# Allegro board LinkingInterfaceV1.2.brd
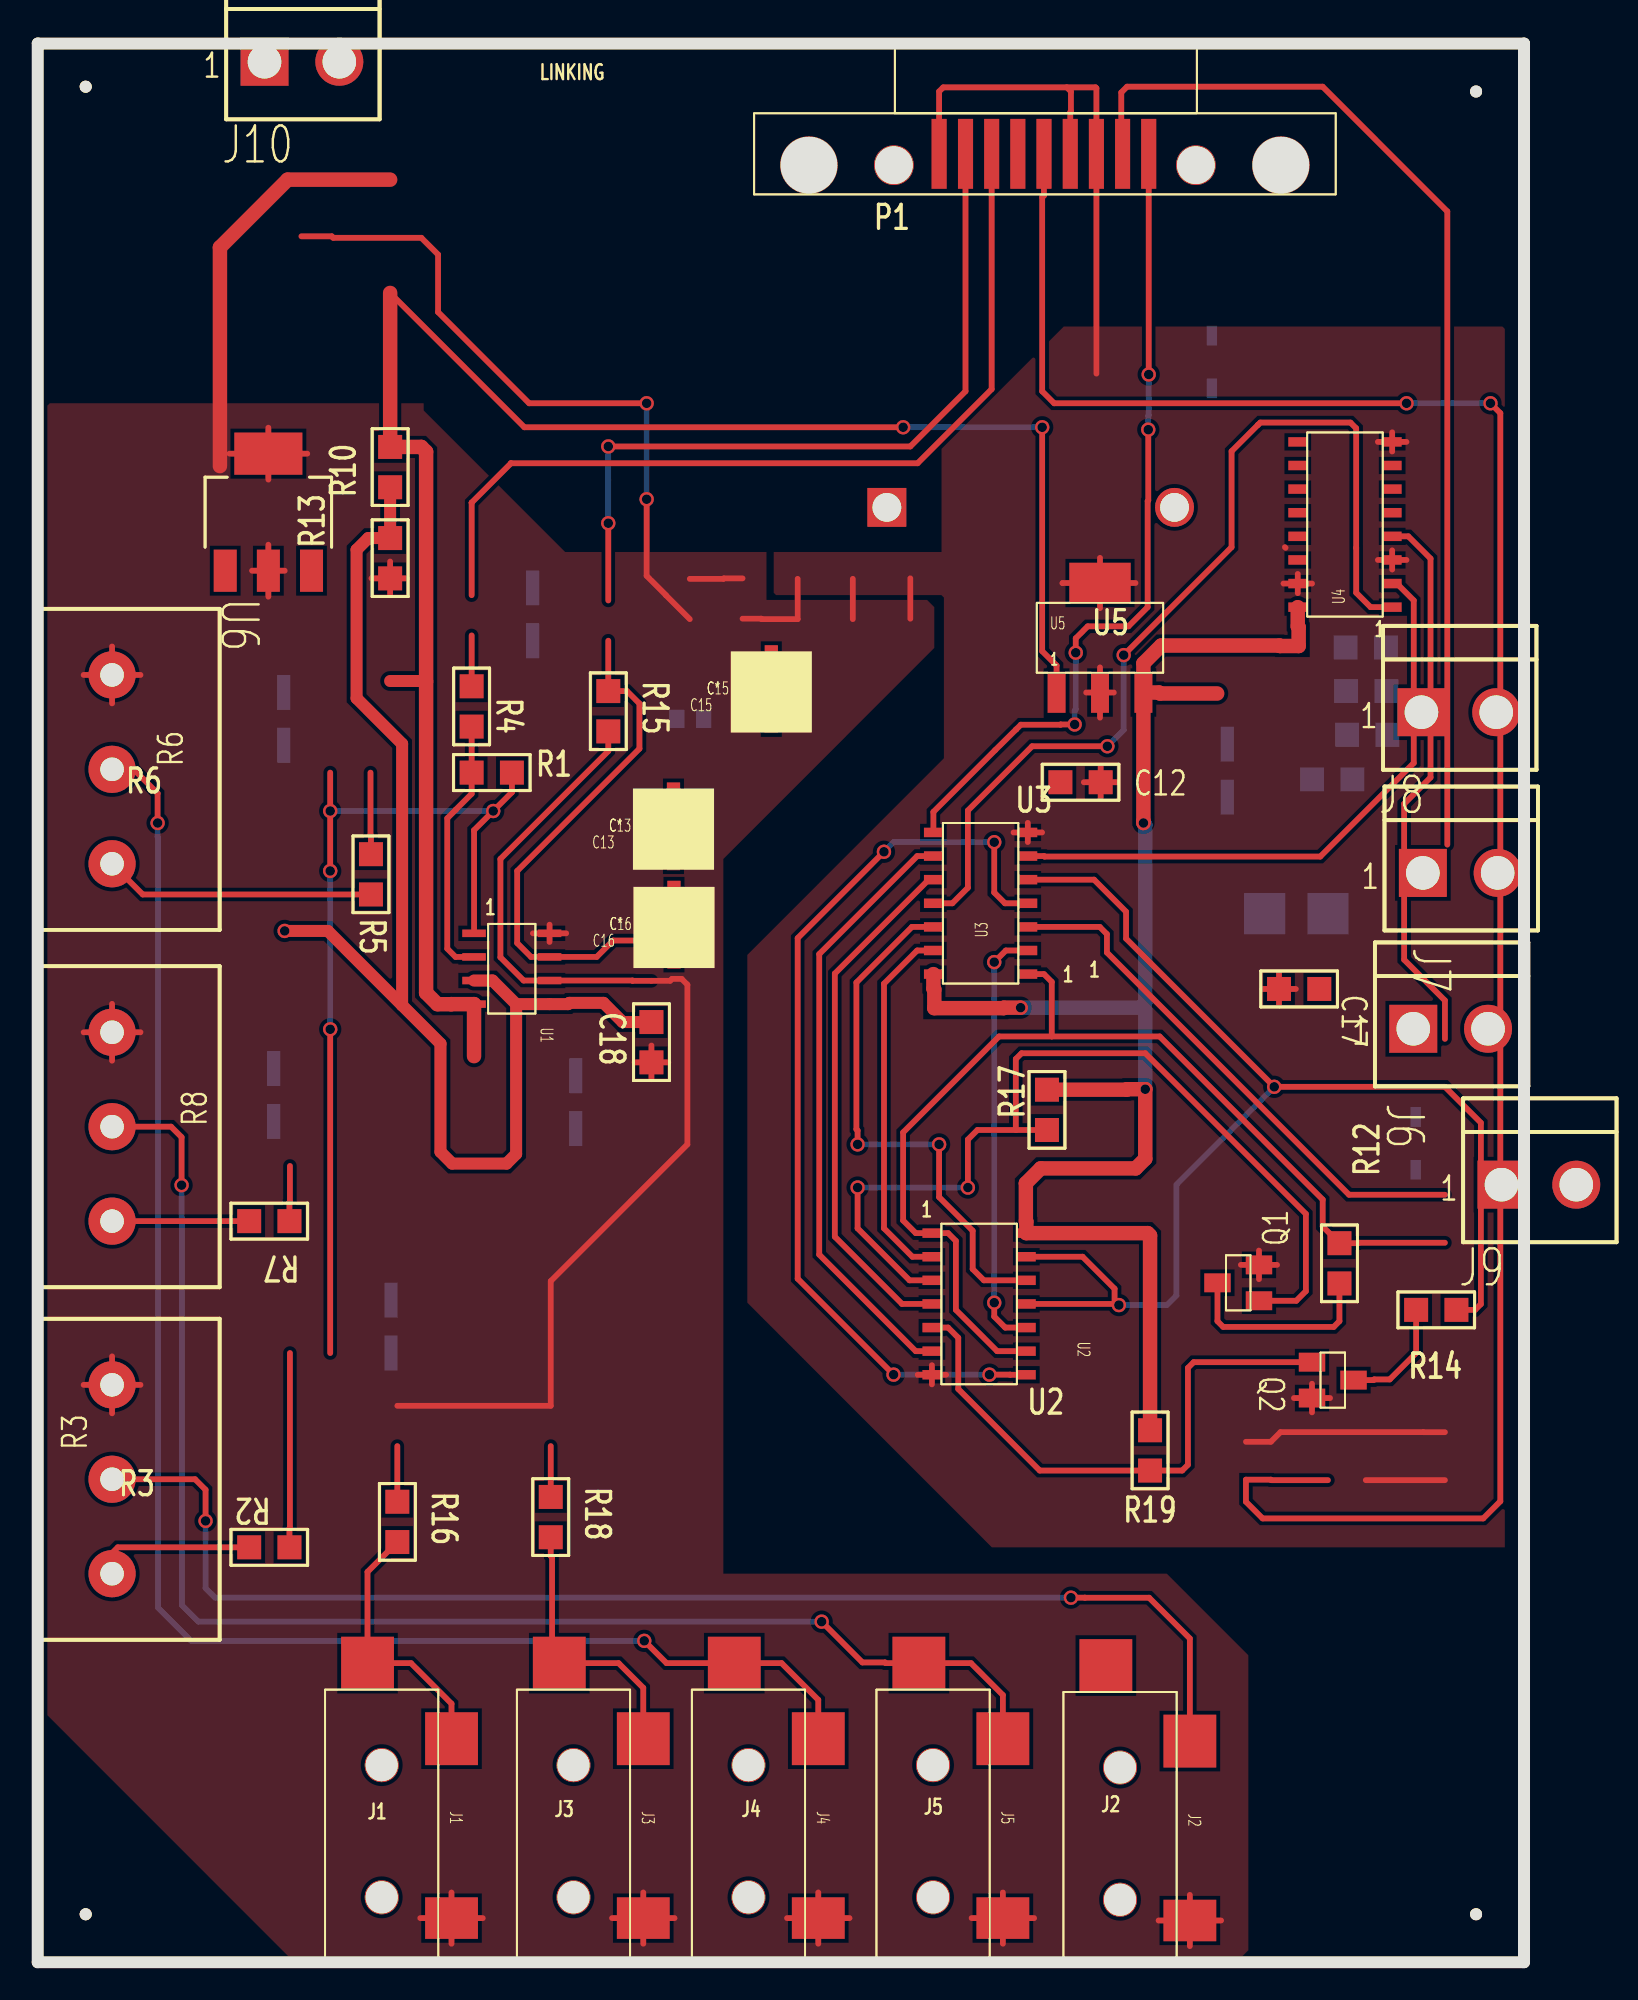
[diagram p0: board, top side]
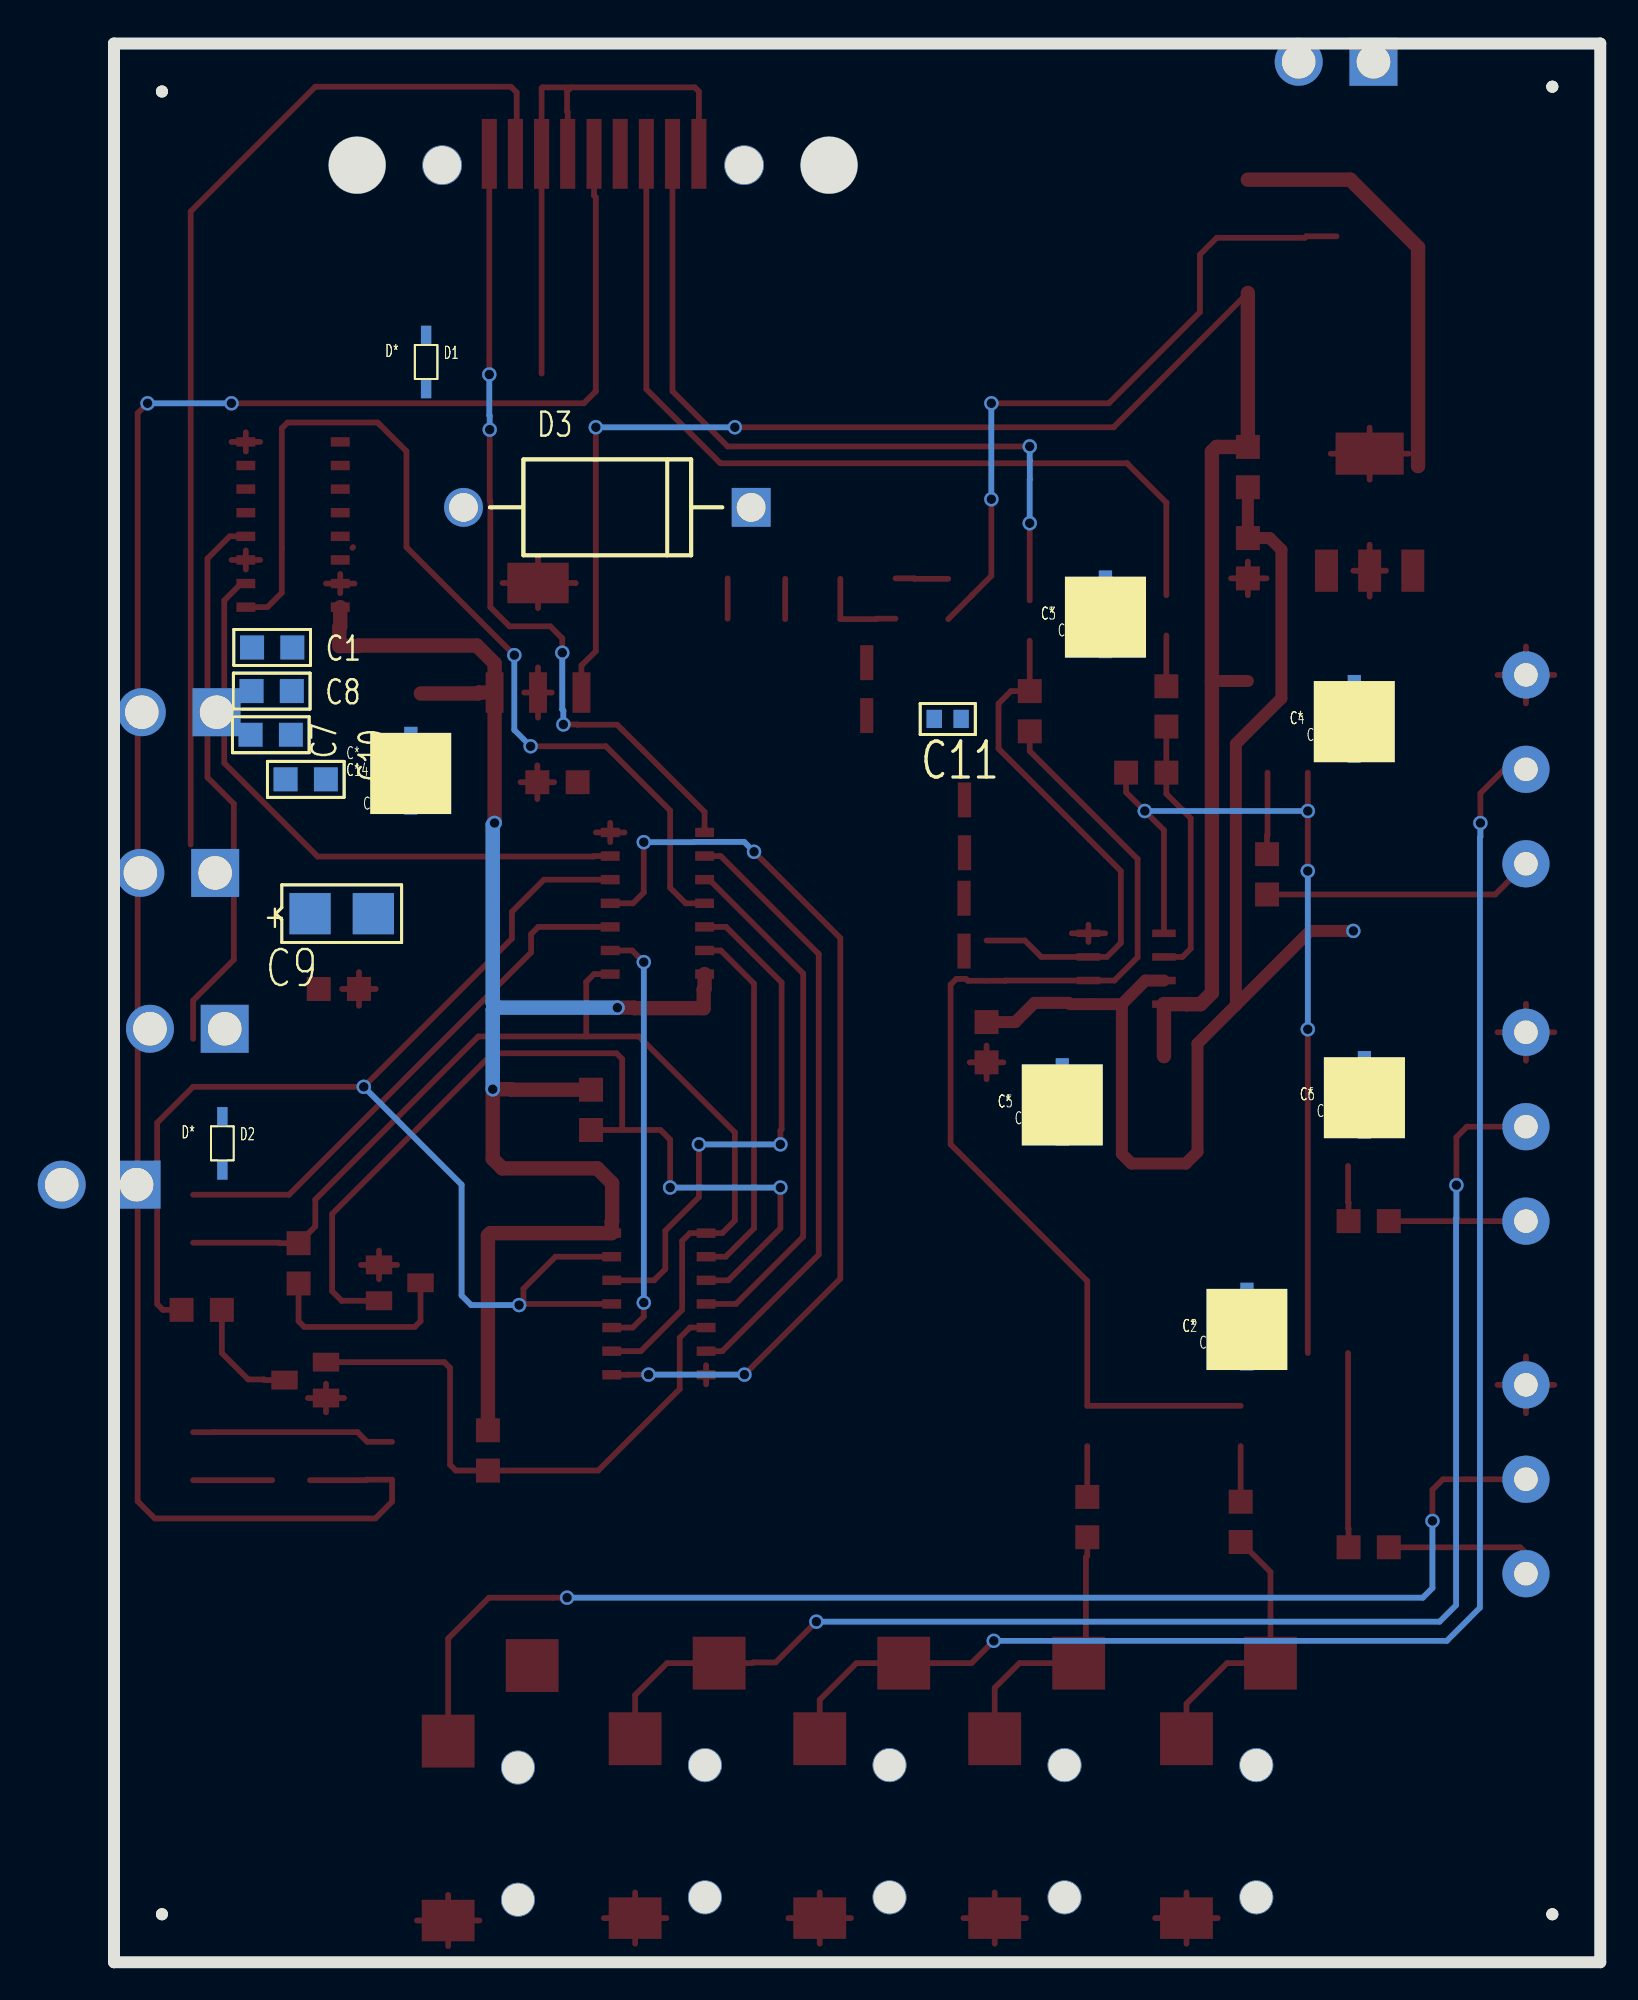
[diagram p1: board, bottom side, seen from below]

Outline 78.74 x 101.6 mm; copper layers: TOP, BOTTOM. Coordinates in mm from the lower left corner of the outline.
Outline path: 0,101.6 78.74,101.6 ; 0,101.6 78.74,101.6 ; 0,101.6 0,0 ; 0,101.6 0,0 ; 78.74,101.6 78.74,0 ; 78.74,101.6 78.74,0 ; 0,0 78.74,0 ; 0,0 78.74,0

## Placement (name value [footprint] x y rotation side)
C1  100nF  [SMC0805]  71.42 69.62 180 bottom
C2  10uF  [1_UF_CAP]  18.72 32.26 180 bottom
C3  1uF  [1_UF_CAP]  26.21 69.98 180 bottom
C4  10uF  [1_UF_CAP]  13.03 64.44 180 bottom
C5  4.7uF  [1_UF_CAP]  28.5 44.15 180 bottom
C6  10uF  [1_UF_CAP]  12.5 44.53 180 bottom
C7  100nF  [SMC0805]  71.5 65 180 bottom
C8  100nF  [SMC0805]  71.45 67.31 180 bottom
C9  22uF/Tant  [EIAB_SMCT3528_12]  68.35 55.52 180 bottom
C10  100nF  [SMC0805]  69.65 62.64 180 bottom
C11  100pF  [SMC0603]  35.28 65.84 180 bottom
C12  470nF  [SMC0805]  54.18 62.48 0 top
C13  10uF  [1_UF_CAP]  33.68 58.75 0 top
C14  10uF  [1_UF_CAP]  63.02 61.7 180 bottom
C15  10uF  [1_UF_CAP]  38.86 66.01 0 top
C16  10uF  [1_UF_CAP]  33.71 53.54 0 top
C17  100nF  [SMC0805]  65.76 51.54 0 top
C18  4.7uF  [SMR0805]  32.51 49.78 270 top
D1  1N4148  [1N4148_SOD523]  62.2 83.34 180 bottom
D2  1N4148  [1N4148_SOD523]  73 41.96 180 bottom
D3  SB1245  [DAX600_60D]  60.22 77.04 180 bottom
J1  TX_ECHOLINK  [35MMJACK]  21.97 2.29 270 top
J2  RX_ECHOLINK  [35MMJACK]  61.09 2.16 270 top
J3  TX_ALLSTAR  [35MMJACK]  32.13 2.29 270 top
J4  RX_ALLSTAR  [35MMJACK]  41.4 2.29 270 top
J5  RX_DTMF  [35MMJACK]  51.18 2.29 270 top
J6  2Pin Header  [BLKCON156_VHTM1SQ_SW156_2]  72.87 49.43 0 top
J7  2Pin Header  [BLKCON156_VHTM1SQ_SW156_2]  73.38 57.68 0 top
J8  2Pin Header  [BLKCON156_VHTM1SQ_SW156_2]  73.3 66.19 0 top
J9  2Pin Header  [BLKCON156_VHTM1SQ_SW156_2]  77.55 41.17 0 top
J10  0.156 VH  [BLKCON156_VHTM1SQ_SW156_2]  12.01 100.63 0 top
NOREF  -  [unnamed]  76.2 99.06 180 bottom
NOREF#2  -  [unnamed]  2.54 2.54 180 bottom
NOREF#3  -  [unnamed]  2.54 99.31 180 bottom
NOREF#4  -  [unnamed]  76.2 2.54 180 bottom
P1  CONNECTOR DB9  [DB9_263_R001]  47.75 95.76 0 top
Q1  -  [2N4401]  64.77 36.96 90 top
Q2  -  [2N4401]  67.44 29.84 270 top
R1  51k  [SMR0805]  22.99 62.99 0 top
R2  22k  [SMR0805]  13.34 21.97 180 top
R3  10k  [P60-20748]  3.94 20.57 90 top
R4  51k  [SMR0805]  22.99 67.56 270 top
R5  22k  [SMR0805]  17.65 58.67 270 top
R6  10k  [P60-20748]  3.94 58.17 90 top
R7  7.5k  [SMR0805]  13.34 39.24 180 top
R8  10k  [P60-20748]  3.94 39.24 90 top
R10  51k  [SMR0805]  18.67 78.11 90 top
R12  10K  [SMR0805]  68.96 35.94 90 top
R13  51k  [SMR0805]  18.67 73.28 90 top
R14  10K  [SMR0805]  73.03 34.54 0 top
R15  51k  [SMR0805]  30.23 67.31 270 top
R16  51k  [SMR0805]  19.05 24.38 270 top
R17  10K  [SMR0805]  53.47 44.07 90 top
R18  51k  [SMR0805]  27.18 24.64 270 top
R19  10K  [SMR0805]  58.93 26.04 90 top
U1  TL072  [TL082]  23.11 54.48 270 top
U2  74HC04  [74HC0]  47.37 38.61 270 top
U3  74HC08  [74HC0]  52.45 52.32 90 top
U4  -  [74HC157]  71.75 71.76 90 top
U5  LM2936/SOT  [LM2936_SOT]  53.98 67.18 0 top
U6  LM2940 / SOT223  LDO  [SOT223_1234]  9.93 73.69 0 top

## Library data of the parts
C1 C7 C8 C10-C12 C17 = C NP
C2 C4-C6 C14 C15 C18 = CAP POL
C3 C13 C16 = CAPACITOR POL
C9 = C POL
D1 D2 = 1N4148
D3 = DIODE SCHOTTKY_0
J1-J5 = PHONE JACK-3_2
J6-J9 = 2Pin Header
J10 = HEADER 2_4
P1 = CONNECTOR DB9
Q1 Q2 = 2N4401
R1 R2 R4 R5 R7 R10 R12-R19 = RESISTOR
R3 R6 R8 = POT
U1 = TL062_2
U2 = 74HC04_4
U3 = 74HC08_3
U4 = 74HC157_4
U5 = LM2936/SO_3
U6 = 78L05/TO92_4

## Footprints (pads in the part's own frame, mm; a bottom-side part is the same pattern mirrored in y, then rotated)
1_UF_CAP
  rect 0.701x1.849 smd: 1(0,0) 2(0,2.799)
1N4148_SOD523
  rect 0.551x1.049 smd: 1(0,0) 2(0,2.799)
2N4401
  rect 1.001x1.4 smd: 1(-0.03,0.071) 2(-0.98,2.271) 3(-1.93,0.071)
35MMJACK
  round 1.801 hole 1.699: (-8.151,-3.749) (-1.151,-3.749)
  rect 2.2x2.799 smd: 1(-0.051,-0.051)
  rect 2.799x2.799 smd: 2(-9.55,-0.051) 3(-13.551,-4.501)
74HC0
  rect 0.5x1.001 smd: 1(0,0) 2(1.25,0) 3(2.499,0) 4(3.749,0) 5(5.001,0) 6(6.251,0) 7(7.501,0) 8(7.501,5.001) 9(6.251,5.001) 10(5.001,5.001) 11(3.749,5.001) 12(2.499,5.001) 13(1.25,5.001) 14(0,5.001)
74HC157
  rect 0.5x1.001 smd: 1(0,0) 2(1.25,0) 3(2.499,0) 4(3.749,0) 5(5.001,0) 6(6.251,0) 7(7.501,0) 8(8.75,0) 9(8.75,5.001) 10(7.501,5.001) 11(6.251,5.001) 12(5.001,5.001) 13(3.749,5.001) 14(2.499,5.001) 15(1.25,5.001) 16(0,5.001)
BLKCON156_VHTM1SQ_SW156_2
  rect 2.54x2.54 hole 1.778: 1(0,0)
  round 2.54 hole 1.778: 2(3.962,0)
DAX600_60D
  round 2.057 hole 1.524: 1(0,0)
  rect 2.057x2.057 hole 1.524: 2(15.24,0)
DB9_263_R001
  round 3.048 hole 3: (-6.896,-0.599) (18.105,-0.599)
  round 2.101 hole 1.999: (-2.395,-0.599) (13.604,-0.599)
  rect 0.8x3.701 smd: 1(0,0) 2(1.4,0) 3(2.784,0) 4(4.171,0) 5(5.555,0) 6(6.949,0) 7(8.334,0) 8(9.721,0) 9(11.105,0)
EIAB_SMCT3528_12
  rect 2.184x2.184 smd: 1(0,0) 2(3.353,0)
LM2936_SOT
  rect 0.95x2.149 smd: 1(0,0.051) 2(2.301,0.051) 3(4.6,0.051)
  rect 3.251x2.149 smd: 4(2.301,5.85)
P60-20748
  round 2.499 hole 1.25: 1(0,0) 2(5.001,0) 3(10,0)
SMC0603
  rect 0.813x0.965 smd: 1(0,0) 2(1.422,0)
SMC0805
  rect 1.27x1.27 smd: 1(0,0) 2(2.134,0)
SMR0805
  rect 1.27x1.27 smd: 1(0,0) 2(2.134,0)
SOT223_1234
  rect 1.219x2.235 smd: 1(0,0) 2(2.286,0) 3(4.572,0)
  rect 3.607x2.235 smd: 4(2.286,6.198)
TL082
  rect 0.399x1.25 smd: 1(0,0) 2(1.25,0) 3(2.499,0) 4(3.749,0) 5(3.749,4) 6(2.499,4) 7(1.25,4) 8(0,4)
unnamed
  round 0.635 hole 3.175 unplated: (0,0)

## Nets
+4.5V: C5.1 C18.1 R10.1 R13.2 U1.3(+IN) U1.5(+IN)
+5V: C7.2(B) C8.2(B) C10.2(B) C14.1 R17.2 R19.2 U2.14(+5V) U3.14(+5V) U4.16(+5V) U5.3(VOUT)
+9V: C1.2(B) C9.1(P) C17.2(B) R10.2 U1.4(+9V) U5.1(VIN) U6.3(OUT)
GND: C1.1(A) C5.2 C7.1(A) C8.1(A) C9.2(N) C10.1(A) C12.2(B) C14.2 C17.1(A) C18.2 J1.1 J2.1 J3.1 J4.1 J5.1 J8.1 J10.2 P1.1 P1.6 P1.7 Q1.1(EMITTER) Q2.1(EMITTER) R3.3(B) R6.3(B) R8.3(B) R13.1 U1.8(GND) U2.7(GND) U3.7(GND) U4.3(1B) U4.8(GND) U4.15(E\N\) U5.2(GND#2) U5.4(GND#4) U6.2(G1) U6.4(G2)
AUDIO_AUX: C3.1 P1.3
AUDIOOUT: C15.2 P1.2
COS: D1.2 D2.2 P1.5
COS_ALLSTAR: D2.1 J9.1
COS_ECHOLINK: D1.1 J9.2
DTMF_AUDIO: J5.2 J5.3 R8.2(WIPER)
INHIBIT: J8.2 P1.8
MUTE_A: U3.6(Y) U4.2(1A)
MUTE_E: J7.2 U3.3(Y)
PTT: P1.9 U3.8(Y)
PTT_A: J6.2 R14.2 U2.11(A) U2.13(A) U3.5(B)
PTT_E: J7.1 R12.2 U2.1(A) U2.9(A) U3.1(A)
RX_A: J4.2 J4.3 R6.2(WIPER)
RX_E: J2.2 R3.2(WIPER)
TX_A: J3.2 J3.3 R18.2
N88507: C11.2(B) C13.1 C16.1 R15.2 U1.6(-IN)
N88575: C11.1(A) C15.1 R15.1 U1.7(OUT)
N89923: C2.1 C4.1 C6.1 R1.2 U1.1(OUT)
N90145: C13.2 R16.1
N90149: C16.2 R18.1
N90821: Q2.3(COLLECTOR) R19.1 U2.5(A)
N90849: R1.1 R4.2 U1.2(-IN)
N95479: U2.2(Y) U3.13(B)
N97065: Q1.3(COLLECTOR) R17.1 U2.3(A)
N97388: Q1.2(BASE) R12.1
N97431: Q2.2(BASE) R14.1
N101741: U3.11(Y) U4.1(SEL)
N134507: C2.2 R2.1
N134567: C6.2 R7.1
N134575: C4.2 R5.1
N134810: R2.2 R3.1(A)
N146635: U2.4(Y) U3.10(B)
N146671: U2.6(Y) U3.9(A)
N163525: U2.10(Y) U3.2(B)
N178407: U2.12(Y) U3.12(A)
N189940: J6.1 U4.4(1Y)
N195958: J1.2 J1.3 R16.2
N211815: U2.8(Y) U3.4(A)
N903830: R7.2 R8.1(A)
N904010: R5.2 R6.1(A)
N908811: C3.2 R4.1
N14521945: C12.1(A) D3.2(CATHODE) U6.1(IN)
N14522952: D3.1(ANODE) J10.1

Pads without a net: J2 3; P1 4; U4 5 6 7 9 10 11 12 13 14

## Via types
v1: diameter 0.762, hole 0.508, TOP to BOTTOM, 40 vias

## Routing (per net, layer and track width the routed paths; a pad name or vN(x,y) marks a point on that pad's centre or on a via; arc(x,y) is an arc through that point)
+4.5V: length 69.1
  TOP w0.635: 25.34,50.73 24.09,51.98 U1.3 ; 25.34,50.73 U1.5 28.09,50.73 28.16,50.8 29.97,50.8 30.99,49.78 C18.1 ; 25.34,50.73 25.34,42.8 24.84,42.29 21.96,42.29 21.34,42.91 21.34,48.64 19.3,50.67 ; 19.3,50.67 15.37,54.61 v1(13.08,54.61) ; 19.3,50.67 19.3,64.52 16.89,66.93 16.89,74.79 17.51,75.41 R13.2 R10.1
+5V: length 85.5
  TOP w0.762: R17.2 57.68,46.2 57.71,46.23 v1(58.67,46.23) 58.67,42.55 58.17,42.04 53.14,42.04 52.35,41.25 52.35,39.24 52.37,39.22 U2.14 58.8,38.61 58.93,38.48 R19.2 ; U5.3 58.57,68.78 59.52,69.72 65.79,69.72 65.81,69.7 66.8,69.7 66.8,70.69 66.75,70.74 U4.16 ; U5.3 58.57,60.42 58.58,60.42 v1(58.58,60.33) ; U5.3 59.41,67.23 59.46,67.18 62.48,67.18 ; U3.14 47.45,51.56 47.5,51.51 47.5,50.52 51.17,50.52 51.19,50.55 v1(52.07,50.55)
  BOTTOM w0.762: 58.55,50.55 58.55,50.67 58.67,50.8 58.67,60.23 v1(58.58,60.33) ; 58.55,50.55 v1(52.07,50.55) ; 58.55,50.55 58.67,50.42 v1(58.67,46.23)
+9V: length 98.1
  TOP w0.305: v1(45.85,81.28) 25.78,81.28 18.67,88.39 ; v1(53.21,81.28) 53.21,69.43 53.98,68.66 U5.1 ; 20.55,67.84 20.57,67.82
  TOP w0.635: 18.67,67.84 20.55,67.84
  TOP w0.762: 23.11,47.98 U1.4 21.9,50.73 21.9,50.73 21.17,50.73 20.57,51.33 20.57,79.98 20.32,80.24 R10.2 18.67,88.39
  BOTTOM w0.305: v1(53.21,81.28) v1(45.85,81.28)
GND: length 258.1
  TOP w0.305: 51.13,0.98 J5.1 ; J5.1 52.79,2.34 ; J5.1 51.13,3.69 ; J5.1 49.47,2.34 ; R8.3 5.44,49.24 ; R8.3 2.43,49.24 ; R8.3 3.94,47.74 ; R8.3 3.94,50.75 ; U4.8 72.51,80.51 ; U4.8 71.75,80 ; U4.8 71,80.51 ; U4.8 71.75,81.01 ; 30.42,2.34 J3.1 ; J3.1 32.08,3.69 ; J3.1 33.74,2.34 ; J3.1 32.08,0.98 ; Q2.1 67.51,30.63 ; Q2.1 66.55,29.88 ; Q2.1 68.47,29.88 ; Q2.1 67.51,29.12 ; U2.7 48.13,31.11 ; U2.7 47.37,31.62 ; U2.7 47.37,30.6 ; U2.7 46.61,31.11 ; 37.34,71.15 38.33,71.15 38.35,71.12 40.26,71.12 40.26,73.25 ; U5.2 56.28,68.56 ; U5.2 56.28,65.9 ; U5.2 55.54,67.23 ; U5.2 57.01,67.23 ; 2.43,30.57 R3.3 ; R3.3 3.94,29.07 ; R3.3 3.94,32.08 ; R3.3 5.44,30.57 ; P1.6 54.7,97.97 54.74,98 54.74,99.06 54.52,99.28 ; 74.55,25.53 70.36,25.53 ; 43.18,71.12 43.18,73.25 ; U4.15 67.51,73 ; U4.15 66,73 ; U4.15 66.75,73.51 ; U4.15 66.75,72.5 ; 13.97,91.39 15.58,91.39 15.65,91.31 20.32,91.31 21.21,90.42 21.21,87.38 26.04,82.55 v1(32.26,82.55) ; J2.1 61.04,3.57 ; J2.1 59.38,2.21 ; J2.1 62.69,2.21 ; J2.1 61.04,0.85 ; 56.28,71.7 U5.4 ; U5.4 54.3,73.03 54.29,73.02 ; U5.4 56.28,74.36 ; U5.4 58.16,73.03 ; 71,74.25 U4.3 ; U4.3 71.75,74.76 ; U4.3 72.51,74.25 ; U4.3 71.75,73.75 ; 12.22,78.51 U6.4 ; U6.4 14.28,79.88 ; U6.4 10.16,79.88 ; U6.4 12.22,81.26 ; 21.92,0.98 J1.1 ; J1.1 21.92,3.69 ; J1.1 23.58,2.34 ; J1.1 20.26,2.34 ; 54.52,99.28 47.97,99.28 47.75,99.06 P1.1 ; 54.52,99.28 56.04,99.28 56.09,99.24 P1.7 56.09,84.12 ; 19.05,29.46 27.18,29.46 27.18,36.07 34.42,43.31 34.42,51.77 34.11,52.07 33.6,52.07 33.5,51.97 32.51,51.97 ; 66.11,74.9 66.07,74.93 ; 34.54,73.25 36.32,73.25 36.35,73.28 37.34,73.28 ; 31.62,47.65 C18.2 ; C18.2 33.4,47.65 ; C18.2 32.51,48.54 ; C18.2 32.51,46.76 ; J4.1 43.01,2.34 ; J4.1 41.35,0.98 ; J4.1 39.7,2.34 ; J4.1 41.35,3.69 ; U3.7 53.21,59.82 ; U3.7 52.45,60.33 ; U3.7 52.45,59.32 ; U3.7 51.69,59.82 ; R6.3 5.44,68.17 ; R6.3 3.94,66.66 ; R6.3 3.94,69.67 ; R6.3 2.43,68.17 ; U1.8 27.11,54.94 ; U1.8 27.11,54.03 ; U1.8 28,54.48 ; U1.8 26.23,54.48 ; 64.7,36.17 Q1.1 ; Q1.1 65.66,36.93 ; Q1.1 63.74,36.93 ; Q1.1 64.7,37.68 ; 18.67,72.39 R13.1 ; R13.1 17.68,73.28 ; R13.1 18.67,74.17 ; R13.1 19.56,73.28 ; 12.22,72.31 U6.2 ; U6.2 12.22,75.06 ; U6.2 11.35,73.69 ; U6.2 13.08,73.69 ; 46.23,71.15 46.23,73.28 ; 56.31,61.59 C12.2 ; C12.2 55.42,62.48 ; C12.2 56.31,63.38 ; C12.2 57.2,62.48 ; 34.54,71.12 33.28,72.38 33.28,72.39 32.26,73.41 v1(32.26,77.47) ; 74.55,28.07 73.41,28.07 73.4,28.07 65.84,28.07 65.33,27.56 64.01,27.56 ; C17.1 66.65,51.54 ; C17.1 65.76,50.65 ; C17.1 65.76,52.43 ; C17.1 64.87,51.54
  TOP w0.762: 18.67,94.39 13.24,94.39 9.65,90.8 9.65,79.22
  BOTTOM w0.305: v1(32.26,77.47) v1(32.26,82.55)
AUDIO_AUX: length 47.4
  TOP w0.305: 25.08,79.37 25.07,79.37 ; 25.07,79.37 22.99,77.29 22.99,77.28 22.99,77.28 22.99,72.39 ; 25.07,79.37 25.07,79.37 46.61,79.37 50.54,83.3 P1.3
AUDIOOUT: length 40.9
  TOP w0.305: v1(30.23,76.2) 30.23,72.11 ; P1.2 49.15,83.19 46.23,80.26 v1(30.23,80.26)
  BOTTOM w0.305: v1(30.23,76.2) 30.23,78.51 30.22,78.52 30.22,79.52 30.23,79.53 v1(30.23,80.26)
COS: length 114.7
  TOP w0.305: v1(72.52,82.55) 53.85,82.55 53.21,83.18 53.21,93.46 53.31,93.55 P1.5 ; 68.35,25.53 65.35,25.53 65.33,25.55 64.01,25.55 64.01,24.38 64.89,23.5 76.58,23.5 77.49,24.41 77.49,82.03 v1(76.96,82.55)
  BOTTOM w0.305: v1(76.96,82.55) v1(72.52,82.55)
DTMF_AUDIO: length 76.5
  TOP w0.305: J5.2 51.13,14.15 49.44,15.84 J5.3 44.92,15.84 44.89,15.87 43.69,15.87 v1(41.53,18.03) ; v1(7.62,41.15) 7.62,43.69 7.06,44.24 R8.2
  BOTTOM w0.305: v1(41.53,18.03) 8.51,18.03 7.64,18.91 7.64,39.39 7.62,39.4 v1(7.62,41.15)
INHIBIT: length 56.9
  TOP w0.305: P1.8 57.4,95.83 57.4,99.01 57.71,99.31 68.07,99.31 74.68,92.71 74.68,59.18
MUTE_A: length 32.6
  TOP w0.305: U3.6 53.31,58.57 53.33,58.55 67.95,58.55 72.9,63.5 72.9,72.11 72,73 U4.2
MUTE_E: length 28.5
  TOP w0.305: 74.55,40.64 69.47,40.64 56.64,53.47 56.64,54.44 56.26,54.82 U3.3
PTT: length 43.6
  TOP w0.305: v1(54.93,65.54) 54.2,65.54 54.18,65.53 52.08,65.53 51.83,65.28 51.83,65.28 50.72,64.18 47.45,60.91 U3.8 ; v1(54.99,69.34) 54.99,70.1 55.63,70.74 57.79,70.74 58.8,71.76 58.8,77.37 58.83,77.41 v1(58.83,81.15) ; v1(58.86,84.07) P1.9
  BOTTOM w0.305: v1(54.93,65.54) 54.93,66.28 54.99,66.34 v1(54.99,69.34) ; v1(58.83,81.15) 58.83,81.89 58.86,81.91 v1(58.86,84.07)
PTT_A: length 68.7
  TOP w0.305: 57.05,34.92 57.05,35.66 55.35,37.36 U2.13 ; 57.05,34.92 56.98,34.86 U2.11 ; 57.05,34.92 57.15,34.92 v1(57.28,34.8) ; R14.2 76.15,34.54 76.45,34.85 76.45,44.45 74.55,46.36 v1(65.51,46.36) 57.66,54.2 57.66,55.63 55.96,57.33 U3.5
  BOTTOM w0.305: v1(65.51,46.36) 60.33,41.17 60.33,35.31 59.82,34.8 v1(57.28,34.8)
PTT_E: length 56.7
  TOP w0.305: 53.72,49.02 59.44,49.02 68.07,40.38 68.07,38.96 R12.2 69.95,38.07 69.98,38.1 74.55,38.1 ; 53.72,49.02 50.93,49.02 45.85,43.94 45.85,39.28 46.52,38.61 U2.1 48.23,38.61 48.64,38.19 48.64,34.54 50.83,32.36 U2.9 ; 53.72,49.02 53.72,51.91 53.31,52.32 U3.1
RX_A: length 85.1
  TOP w0.305: v1(32.13,17.02) 33.31,15.84 J4.3 39.41,15.84 41.35,13.89 J4.2 ; R6.2 5.08,63.17 6.35,61.9 v1(6.35,60.33)
  BOTTOM w0.305: v1(6.35,60.33) 6.35,59.59 6.38,59.56 6.38,18.77 8.13,17.02 v1(32.13,17.02)
RX_E: length 69.1
  TOP w0.305: v1(8.89,23.37) 8.89,25.02 8.33,25.58 R3.2 ; J2.2 61.04,17.14 58.88,19.3 55.48,19.3 55.47,19.3 v1(54.74,19.3)
  BOTTOM w0.305: v1(8.89,23.37) 8.89,19.81 9.4,19.3 v1(54.74,19.3)
TX_A: length 14.8
  TOP w0.305: J3.2 32.08,14.53 30.77,15.84 J3.3 27.25,15.84 27.25,21.44 27.18,21.51 R18.2
N88507: length 22.8
  TOP w0.305: 32.51,51.97 31.52,51.97 31.51,51.98 U1.6 25.74,51.98 24.51,53.21 24.51,58.42 30.23,64.14 R15.2
N88575: length 27.7
  TOP w0.305: 32.51,54.1 30.48,54.1 29.61,53.23 U1.7 26.13,53.23 25.4,53.97 25.4,57.79 31.88,64.26 31.88,66.65 31.22,67.31 R15.1 30.23,69.98
N89923: length 48.7
  TOP w0.305: U1.1 23.11,59.94 v1(24.13,60.96) 25.12,61.95 R1.2 ; 15.49,62.99 v1(15.49,60.96) v1(15.49,57.79) ; 15.49,32.26 v1(15.49,49.4)
  BOTTOM w0.305: v1(15.49,57.79) v1(15.49,49.4) ; v1(15.49,60.96) v1(24.13,60.96)
N90145: length 2.9
  TOP w0.305: 19.05,27.33 R16.1
N90149: length 2.7
  TOP w0.305: 27.18,27.33 R18.1
N90821: length 30.2
  TOP w0.305: Q2.3 61.24,31.78 60.93,31.47 60.93,26.34 60.63,26.04 R19.1 53.09,26.04 48.77,30.35 48.77,33.07 48.23,33.61 U2.5
N90849: length 13.9
  TOP w0.305: U1.2 22.13,53.23 21.7,53.67 21.7,60.58 22.13,61.01 22.13,61.02 22.99,61.87 R1.1 R4.2
N95479: length 19.5
  TOP w0.305: U2.2 46.33,37.36 44.83,38.86 44.83,51.82 46.59,53.57 U3.13
N97065: length 49.6
  TOP w0.305: U2.3 46.19,36.11 43.43,38.86 v1(43.43,41.02) ; 51.82,44.07 R17.1 ; 51.82,44.07 49.78,44.07 49.28,43.56 v1(49.28,41.02) ; 51.82,44.07 51.82,47.83 52.12,48.13 58.67,48.13 67.18,39.62 67.18,35.53 66.68,35.03 Q1.3
  BOTTOM w0.305: v1(49.28,41.02) v1(43.43,41.02)
N97388: length 10.7
  TOP w0.305: R12.1 68.96,33.94 68.66,33.64 62.8,33.64 62.5,33.94 Q1.2
N97431: length 6.2
  TOP w0.305: R14.1 73.03,32.26 71.63,30.86 70.8,30.86 70.76,30.83 Q2.2
N101741: length 51.7
  TOP w0.305: v1(57.53,69.21) 63.25,74.93 63.25,80.01 64.64,81.41 64.65,81.41 64.77,81.53 69.55,81.53 69.85,81.23 69.85,74.89 69.85,74.89 69.85,72.52 70.61,71.76 U4.1 ; U3.11 48.45,56.07 49.28,56.9 49.28,60.99 52.68,64.39 v1(56.67,64.39)
  BOTTOM w0.305: v1(57.53,69.21) 57.53,65.25 v1(56.67,64.39)
N134507: length 10.3
  TOP w0.305: R2.1 13.34,22.96 13.36,22.99 13.36,32.26
N134567: length 2.9
  TOP w0.305: R7.1 13.34,40.23 13.36,40.26 13.36,42.16
N134575: length 4.3
  TOP w0.305: R5.1 17.65,59.66 17.63,59.69 17.63,62.99
N134810: length 8.5
  TOP w0.305: R2.2 4.24,21.97 3.94,21.67 R3.1
N146635: length 27.8
  TOP w0.305: U3.10 47.2,57.33 42.23,52.35 42.23,38.42 45.79,34.86 U2.4
N146671: length 32.2
  TOP w0.305: U2.6 46.52,32.36 41.4,37.47 41.4,53.38 46.59,58.57 U3.9
N163525: length 22.7
  TOP w0.305: U3.2 51.29,53.57 v1(50.67,52.96) ; U2.10 51.25,33.61 50.67,34.19 v1(50.67,34.92)
  BOTTOM w0.305: v1(50.67,52.96) v1(50.67,34.92)
N178407: length 28.6
  TOP w0.305: U2.12 50.12,36.11 49.53,36.7 49.53,38.73 47.75,40.51 v1(47.75,43.31) ; v1(43.43,43.31) 43.43,44.04 43.37,44.11 43.37,51.88 46.31,54.82 U3.12
  BOTTOM w0.305: v1(43.43,43.31) v1(47.75,43.31)
N189940: length 29.4
  TOP w0.305: 74.55,48.89 74.55,50.93 72.39,53.09 72.39,61.34 73.79,62.74 73.79,74.33 72.61,75.5 U4.4
N195958: length 14.3
  TOP w0.305: R16.2 17.47,20.67 J1.3 19.77,15.84 21.92,13.69 J1.2
N211815: length 49.5
  TOP w0.305: v1(50.67,59.31) 50.67,56.64 51.24,56.07 U3.4 ; U2.8 51.52,31.11 51.51,31.11 v1(50.42,31.11) ; v1(44.83,58.8) 40.26,54.23 40.26,36.2 v1(45.34,31.11)
  BOTTOM w0.305: v1(50.42,31.11) v1(45.34,31.11) ; v1(50.67,59.31) 48.01,59.31 47.99,59.32 45.35,59.32 v1(44.83,58.8)
N903830: length 7.3
  TOP w0.305: R8.1 R7.2
N904010: length 14.4
  TOP w0.305: R5.2 5.56,56.54 R6.1
N908811: length 2.7
  TOP w0.305: 22.99,70.26 R4.1

## Copper pours and planes (outline as drawn; the poured copper is in the pictures)
GND on TOP: 77.72,21.97 77.72,86.49 77.6,86.61 54.36,86.61 47.88,80.14 47.88,74.68 38.99,74.68 38.99,72.52 39.12,72.39 47.88,72.39 48.01,72.26 48.01,63.75 37.59,53.34 37.59,34.92 50.55,21.97
GND on TOP: 64.14,0.64 64.14,16.26 59.82,20.57 36.32,20.57 36.32,58.42 47.5,69.6 47.5,71.76 47.12,72.14 38.61,72.14 38.61,74.68 27.94,74.68 20.45,82.17 20.45,82.55 0.64,82.55 0.51,82.42 0.51,13.08 13.34,0.25 63.75,0.25

## Text on the board
Board Geometry/Soldermask Bottom: SMB
Ref Des/Silkscreen Bottom: SSB
TOP: TOP
Board Geometry/Soldermask Top: SMT
Ref Des/Silkscreen Top: 1 | J1 | LINKING | J3 | J4 | J5 | J2 | R3 | R6 | P1 | U3 | U2 | U5 | SST
COMPVAL_TYPE_TOP: FIGURE | SIZE | 20.0 | 42.0 | 49.2 | 66.9 | 78.7 | 118.1 | 125.0 | DRILL CHART: TOP to BOTTOM | ALL UNITS ARE IN MILS | PLATED | NON-PLATED | QTY | 40 | 8 | 12 | 10 | 2 | 4
User.5: BOTTOM
User.6: MECH
